# EAGLE board Gach_Krzysztf_SMiW_proj_pcb (EAGLE 9.7.0)
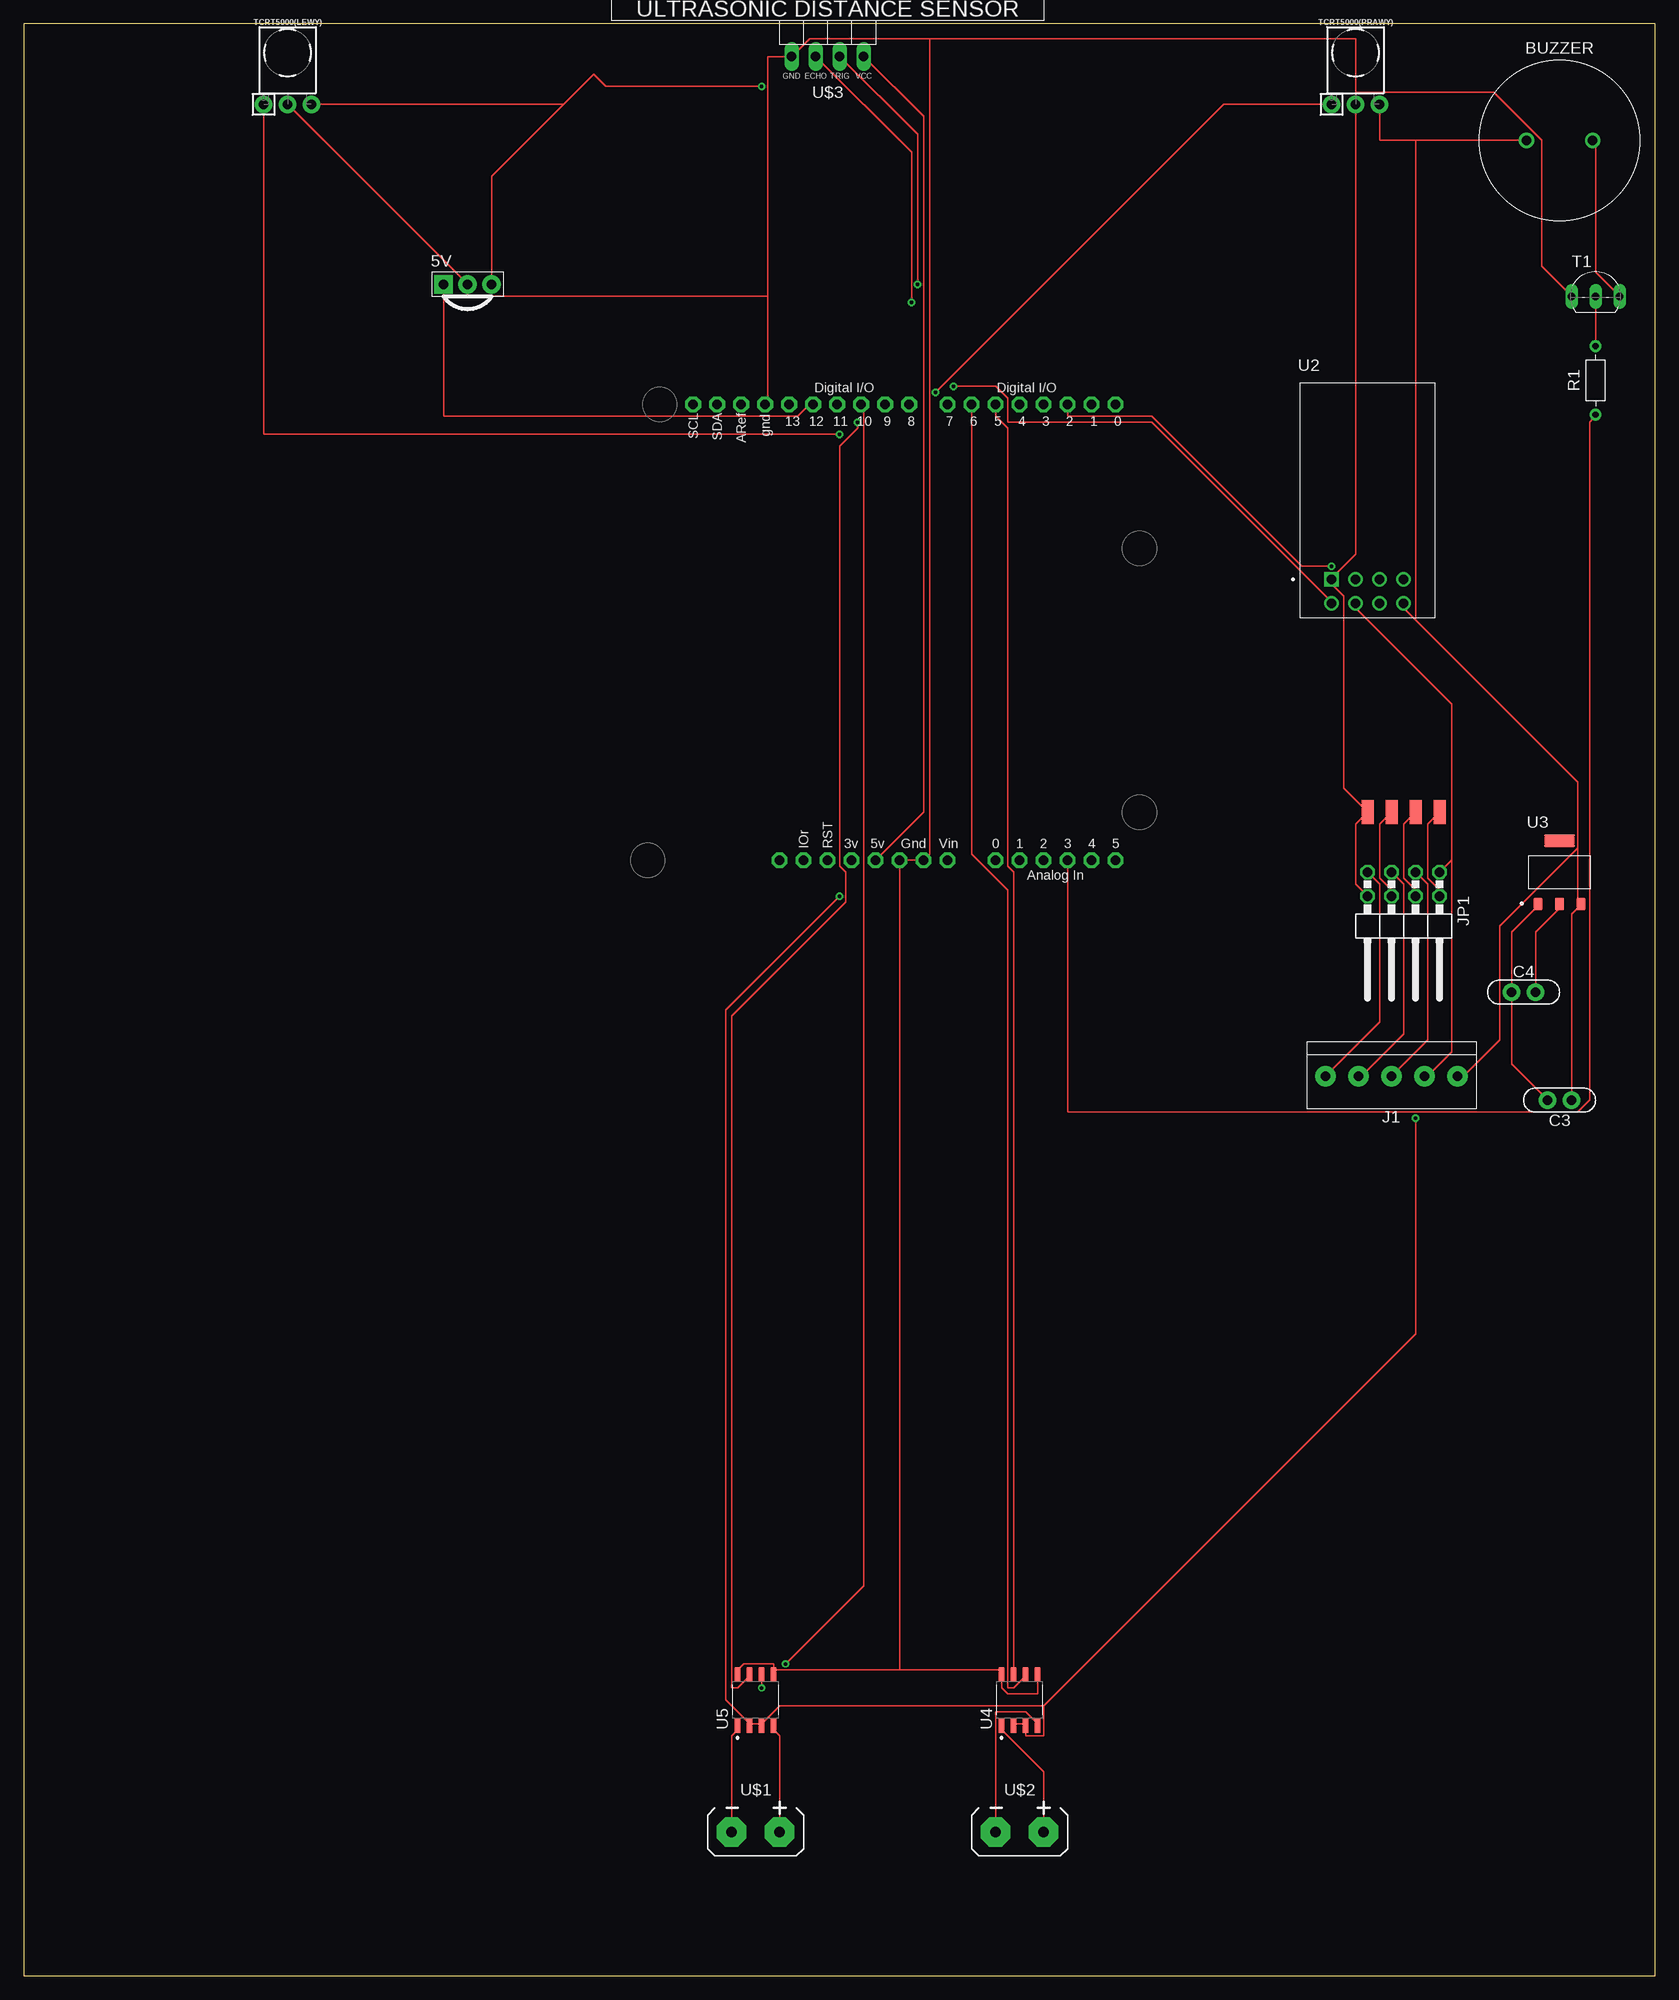
[diagram p0: board, top side]
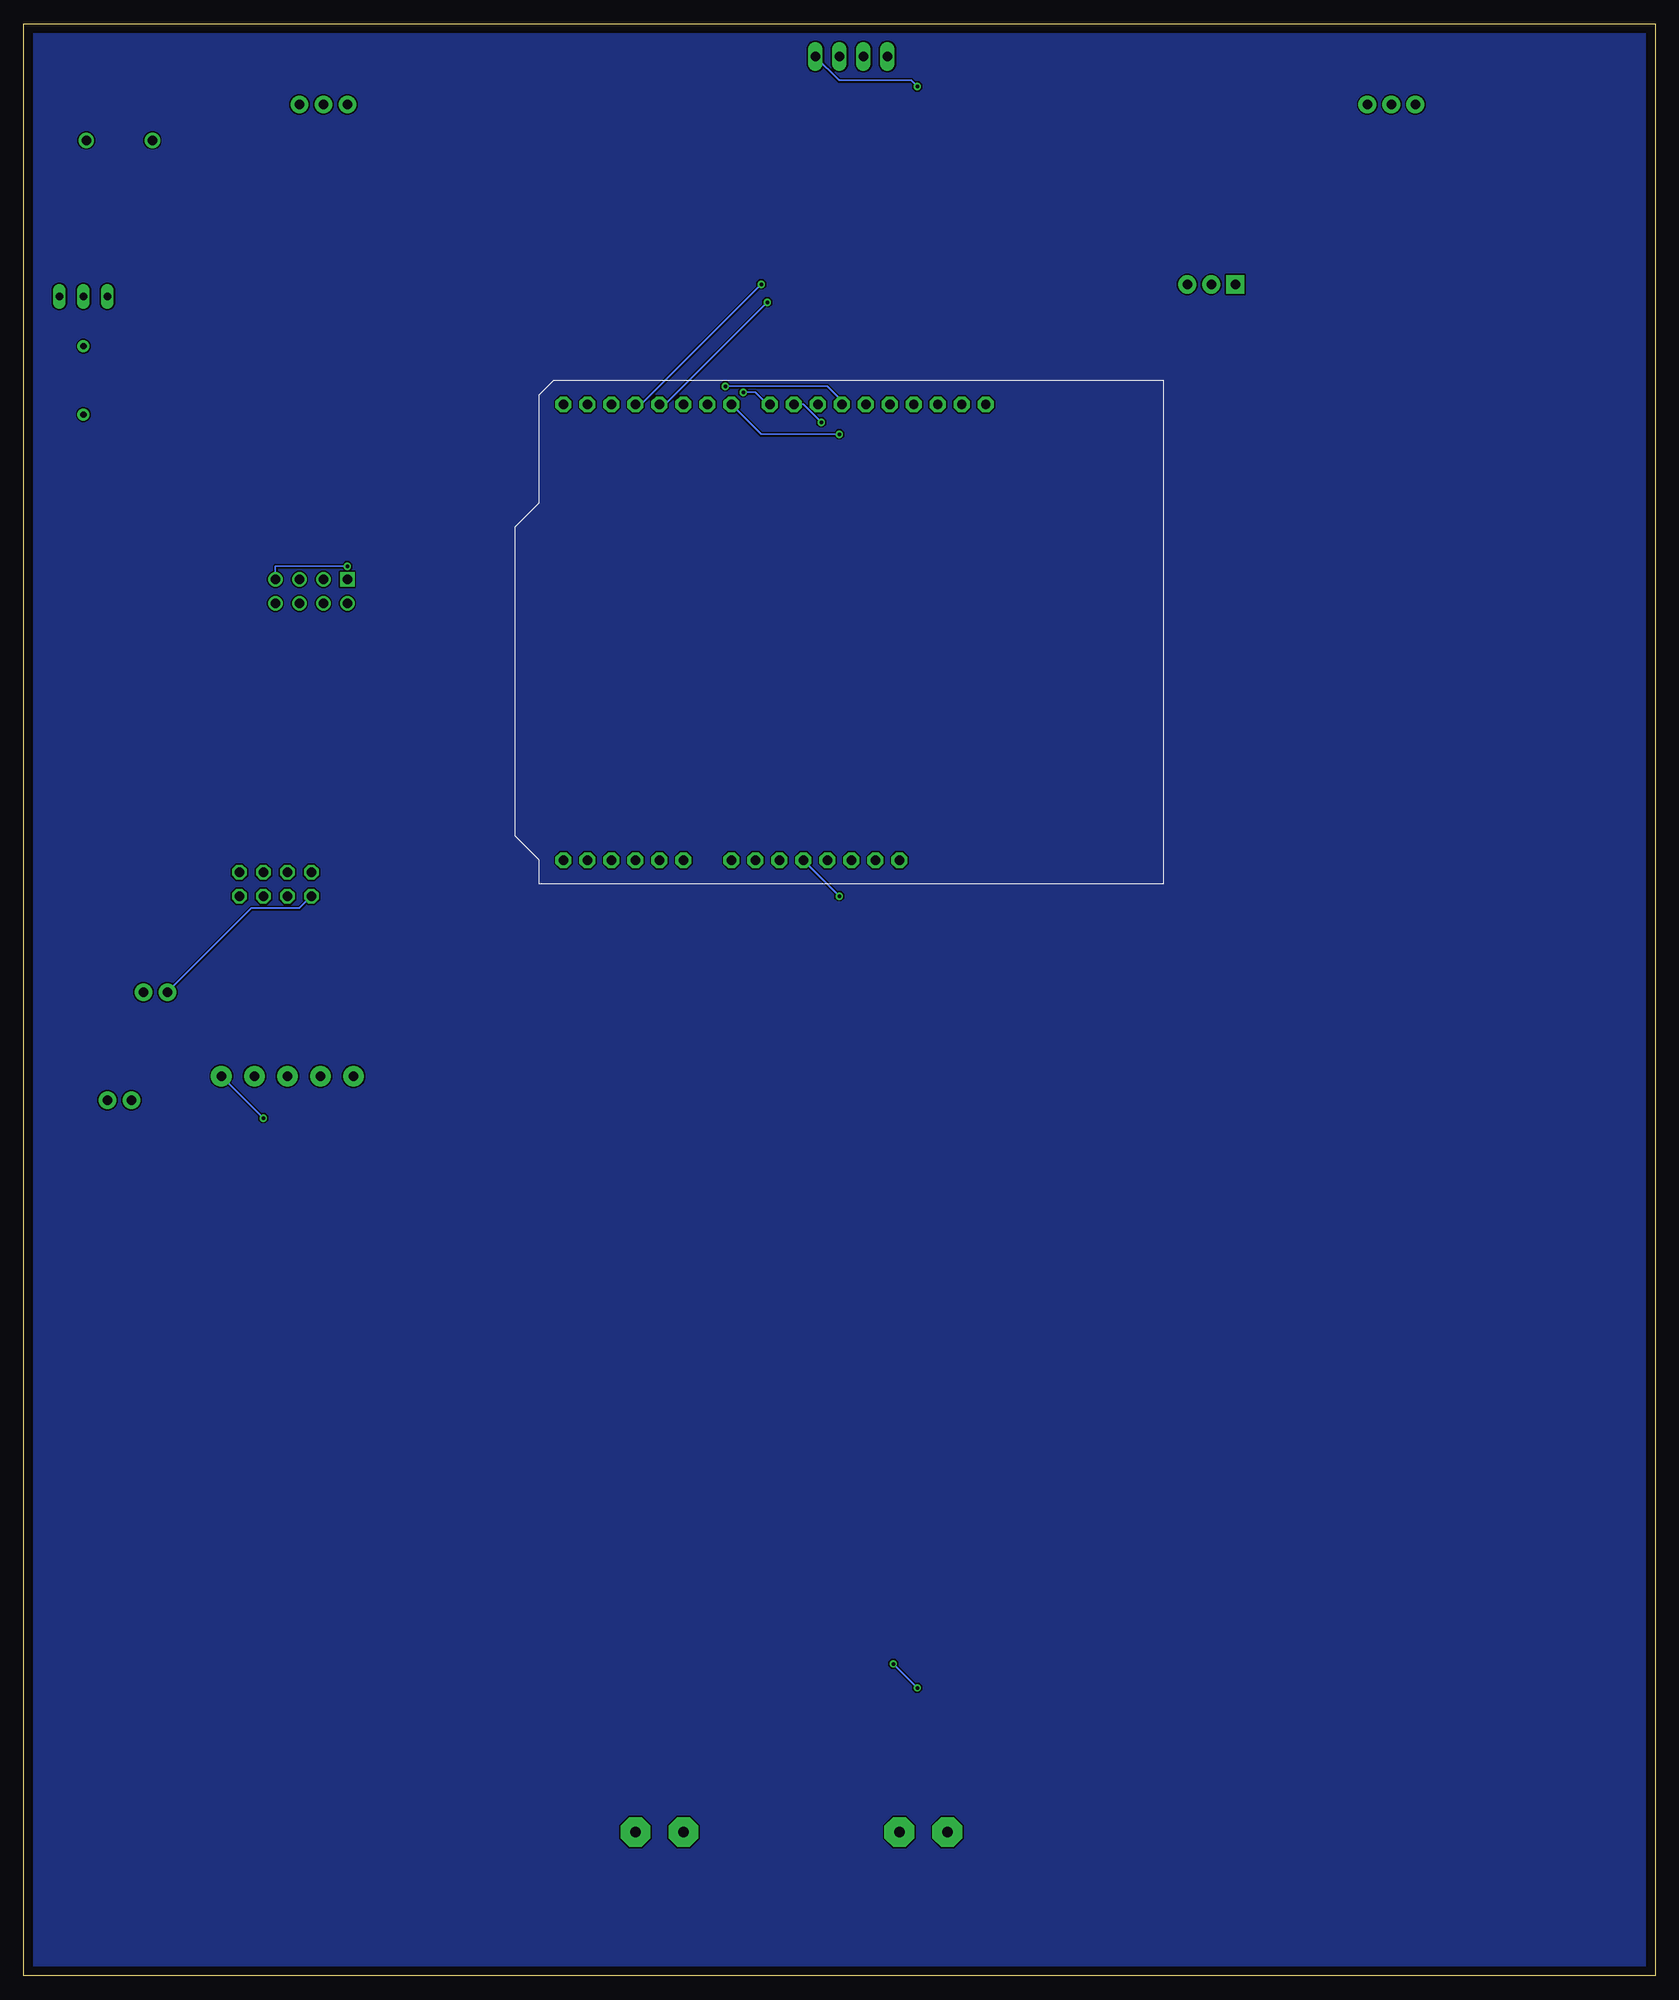
[diagram p1: board, bottom side, seen from below]

Size 172.7 x 206.68 mm. Coordinates in mm from the lower left corner, seen from the top.
Outline: 0,0 172.7,0 172.7,206.68 0,206.68 0,0
Copper layers (1*16): Top / Bottom
Stack-up Default Layer Stack: Top User Defined 0.035mm / Dielectric-1 User Defined 1.5mm / Bottom User Defined 0.035mm
Design rules: minimum copper width 6mil, minimum drill size 0.35mm, copper clearance wire_polygon to wire_polygon 6mil, copper clearance wire_polygon to pad_smd 6mil, copper clearance wire_polygon to via 6mil, copper clearance pad_smd to pad_smd 6mil, copper clearance pad_smd to via 6mil, copper clearance via to via 6mil, copper clearance smd to pad (same net) 6mil, copper clearance smd to via (same net) 6mil, copper clearance smd to smd (same net) 6mil, dimension clearance 40mil, via restrict clearance 0mil, restrict clearance 0mil, drill distance 6mil, keepout clearance 0mil

## Footprints (pad centres in the part's own frame; a part is rotated, then mirrored left to right if it is on the bottom)
PNA460XM = drill 1.016 pad 1.93 square: 1 -2.54,0 | drill 1.016 pad 1.93: 2 0,0; 3 2.54,0
PIEZO = drill 1 pad 1.6: 1 -3.5,0; 2 3.5,0
CAP-THRU-2.54MM = drill 1.016 pad 1.88: 1 -1.27,0; 2 1.27,0
1X4-SMT = smd 1.27 x 2.54: 1 -3.81,0; 2 -1.27,0; 3 1.27,0; 4 3.81,0
1X05-3.5MM = drill 1 pad 2.184: 1 7,0; 2 3.5,0; 3 0,0; 4 -3.5,0; 5 -7,0
2X04/90 = drill 1.016 octagon: 1 -3.81,-6.35; 2 -3.81,-3.81; 3 -1.27,-6.35; 4 -1.27,-3.81; 5 1.27,-6.35; 6 1.27,-3.81; 7 3.81,-6.35; 8 3.81,-3.81
RESAD724W46L381D178B = drill 0.66 pad 1.26: 1 -3.62,0; 2 3.62,0
TO92-EBC-OVAL = drill 0.813 long: B 0,-1.27; C 2.54,-1.27; E -2.54,-1.27
BRM-2508_VERT = drill 1.016 pad 1.88: 1 -2.54,0; 2 0,0; 3 2.54,0
ARDUINOR3-BPLACE = drill 1 pad 1.676 octagon: 3V 35.56,2.54; 5V 38.1,2.54; A0 50.8,2.54; A1 53.34,2.54; A2 55.88,2.54; A3 58.42,2.54; A4 60.96,2.54; A5 63.5,2.54; AREF 23.876,50.8; D0 63.5,50.8; D1 60.96,50.8; D2 58.42,50.8; D3 55.88,50.8; D4 53.34,50.8; D5 50.8,50.8; D6 48.26,50.8; D7 45.72,50.8; D8 41.656,50.8; D9 39.116,50.8; D10 36.576,50.8; D11 34.036,50.8; D12 31.496,50.8; D13 28.956,50.8; GND 26.416,50.8; GND1 43.18,2.54; GND2 40.64,2.54; IOREF 30.48,2.54; RESERVED 27.94,2.54; RESET 33.02,2.54; SCL 18.796,50.8; SDA 21.336,50.8; VIN 45.72,2.54
MODULE_ESP-01 = drill 1 square: 1 -3.81,-8.36 | drill 1: 2 -1.27,-8.36; 3 1.27,-8.36; 4 3.81,-8.36; 5 3.81,-10.9; 6 1.27,-10.9; 7 -1.27,-10.9; 8 -3.81,-10.9
SOT229P700X180-4N = smd 0.93 x 1.31: 1 -2.29,-3.345; 2 0,-3.345; 3 2.29,-3.345 | smd 3.24 x 1.31: 4 0,3.345
SOIC127P599X172-8N = smd 1.55 x 0.58: 1 -2.68,1.905; 2 -2.68,0.635; 3 -2.68,-0.635; 4 -2.68,-1.905; 5 2.68,-1.905; 6 2.68,-0.635; 7 2.68,0.635; 8 2.68,1.905
MOTOR = drill 1.118 pad 3.15 octagon: + 2.54,0; - -2.54,0
HC-SR04 = drill 1.016 long: 1 -3.81,0; 2 -1.27,0; 3 1.27,0; 4 3.81,0

## Placement (x,y rotation side)
5V  PNA460XM  [PNA460XM]  46.99,179.07 0 top
BUZZER  PIEZO  [PIEZO]  162.56,194.31 0 top
C3  100n  [CAP-THRU-2.54MM]  162.56,92.71 180 top
C4  100n  [CAP-THRU-2.54MM]  158.75,104.14 0 top
CN1  1X4SMT  [1X4-SMT]  146.05,123.19 0 top
J1  1X5  [1X05-3.5MM]  144.78,95.25 180 top
JP1  PINHD-2X4/90  [2X04/90]  146.05,110.49 180 top
R1  2k  [RESAD724W46L381D178B]  166.37,168.91 90 top
T1  2N2222  [TO92-EBC-OVAL]  166.37,179.07 0 top
TCRT5000(LEWY)  BRM-2A18VERT  [BRM-2508_VERT]  27.94,198.12 0 top
TCRT5000(PRAWY)  BRM-2A18VERT  [BRM-2508_VERT]  140.97,198.12 0 top
U1  ARDUINOR3-BPLACE  [ARDUINOR3-BPLACE]  52.07,115.57 0 top
U2  ESP-01  [MODULE_ESP-01]  142.24,156.21 0 top
U3  AMS1117-5.0  [SOT229P700X180-4N]  162.56,116.84 0 top
U4  L9110S  [SOIC127P599X172-8N]  105.41,29.21 90 top
U5  L9110S  [SOIC127P599X172-8N]  77.47,29.21 90 top
U$1  MOTOR_HDR  [MOTOR]  77.47,15.24 0 top
U$2  MOTOR_HDR  [MOTOR]  105.41,15.24 0 top
U$3  DISTANCE-SENSOR-4PINHC-SR04  [HC-SR04]  85.09,203.2 180 top

## Library data of the parts
5V CN1 J1 T1 U1 = adafruit
BUZZER C3 C4 U$1-U$3 = Tinkercad
JP1 = Connector; CATEGORY: Headers; DESCRIPTION: Header, Right Angle, 2x4 Position; MANUFACTURER: Generic; MPN: Generic; OPERATING_TEMPERATURE: Generic; PART_STATUS: Active; PITCH: 0.100" (2.54mm); ROHS_COMPLIANCE: Generic; SERIES: Generic; SUB-CATEGORY: Headers, Male Pins; TYPE: Board to Board or Cable, Unshrouded, Through Hole, Right Angle
R1 = Resistor; CATEGORY: Resistor; SUB-CATEGORY: Fixed
TCRT5000(LEWY) TCRT5000(PRAWY) = SparkFun-Sensors; PROD_ID: COMP-12505
U2 = ESP-01; AVAILABILITY: Not in stock; CHECK_PRICES: https://www.snapeda.com/parts/ESP-01/AI-Thinker/view-part/?ref=eda; DESCRIPTION: ESP-01M ESP8266 DIP Adapter series Transceiver; 802.11 b/g/n (Wi-Fi, WiFi, WLAN) Evaluation Board; MF: AI-Thinker; MP: ESP-01; PACKAGE: Non-Standard AI-Thinker; PRICE: None; SNAPEDA_LINK: https://www.snapeda.com/parts/ESP-01/AI-Thinker/view-part/?ref=snap
U3 = AMS1117-5.0; AVAILABILITY: In Stock; CHECK_PRICES: https://www.snapeda.com/parts/AMS1117-5.0/ams/view-part/?ref=eda; DESCRIPTION: 1A LOW DROPOUT VOLTAGE REGULATOR; MF: ams; MP: AMS1117-5.0; PACKAGE: SOT-223 Seeed Technology; PRICE: None; SNAPEDA_LINK: https://www.snapeda.com/parts/AMS1117-5.0/ams/view-part/?ref=snap
U4 U5 = L9110S; AVAILABILITY: Not in stock; CHECK_PRICES: https://www.snapeda.com/parts/L9110S/Onsemi/view-part/?ref=eda; DESCRIPTION: IC REG BUCK BOOST 20WLCSP; MF: LG Semicon; MP: L9110S; PACKAGE: None; PRICE: None; SNAPEDA_LINK: https://www.snapeda.com/parts/L9110S/Onsemi/view-part/?ref=snap

## Nets
3V: U1.3V
3V3: J1.4 JP1.1 U2.7
5V: 5V.3 BUZZER.1 C3.1 J1.5 TCRT5000(LEWY).3 TCRT5000(PRAWY).3 U1.5V U2.5 U3.3 U4.2 U4.3 U5.2 U5.3 U$3.1
A3: R1.1 U1.A3
D2: U1.D2 U2.4
D3: U1.D3 U$3.2
D4: U1.D4 U$3.3
D5: U1.D5 U4.7
D6: U1.D6 U4.6
D7: TCRT5000(LEWY).1 U1.D7
D8: TCRT5000(PRAWY).1 U1.D8
D9: U1.D9 U5.7
D10: U1.D10 U5.6
D11: U1.D11 U2.8
D12: 5V.1 U1.D12
EN: J1.2 JP1.5
GND: 5V.2 C3.2 C4.1 CN1.1 JP1.8 T1.E TCRT5000(LEWY).2 TCRT5000(PRAWY).2 U1.GND U1.GND1 U1.GND2 U2.1 U3.1 U4.5 U4.8 U5.5 U5.8 U$3.4
IO1: CN1.3 JP1.4
IO2: CN1.2 JP1.6
N$1: U5.4 U$1.+
N$2: U5.1 U$1.-
N$3: U4.1 U$2.+
N$4: U4.4 U$2.-
N$5: R1.2 T1.B
N$6: BUZZER.2 T1.C
N$7: C4.2 U3.2
RST: J1.3 JP1.3
RX: CN1.4 JP1.2
TX: J1.1 JP1.7
VIN: U1.VIN

## Tracks (layer width: path | path; a pad name or v marks a point on that pad's centre or on a via)
3V3
  Top 0.152: 151.13,118.11 151.13,134.62 140.97,144.78 U2.7 | JP1.1 151.13,118.11 | 151.13,118.11 151.13,97.79 148.59,95.25 J1.4
5V  (via drill 0.35)
  Top 0.152: 57.15,198.12 49.53,190.5 5V.3 | 57.15,198.12 60.33,201.3 61.59,200.03 v78.11,200.03 | 57.15,198.12 TCRT5000(LEWY).3 | U$3.1 95.25,196.85 95.25,123.19 U1.5V | 78.11,26.67 76.83,26.67 | U4.2 104.78,26.67 106.05,26.67 U4.3 106.05,25.4 107.95,25.4 107.95,28.58 | 78.11,26.67 80.01,28.58 107.95,28.58 | 78.11,26.67 U5.3 | 147.32,194.31 143.51,194.31 TCRT5000(PRAWY).3 | 147.32,194.31 BUZZER.1 | C3.1 163.83,112.4 164.47,113.03 U3.3 164.47,113.67 164.47,119.38 | 147.32,143.51 164.47,126.37 164.47,119.38 | 147.32,143.51 146.05,144.78 U2.5 | 164.47,119.38 156.21,111.12 156.21,99.06 152.4,95.25 J1.5 | 147.32,143.51 147.32,194.31 | 107.95,28.58 147.32,67.95 v147.32,90.81 | v86.36,114.3 74.3,102.24 74.3,29.21 76.83,26.67 | 76.83,26.67 U5.2
  Bottom 0.152: v78.11,200.03 78.74,200.66 86.36,200.66 U$3.1 | v147.32,90.81 151.76,95.25 J1.5 | v86.36,114.3 U1.5V
A3
  Top 0.152: U1.A3 110.49,91.44 164.47,91.44 165.74,92.71 165.74,164.47 166.37,165.1 R1.1
D2  (via drill 0.35)
  Top 0.152: v138.43,149.23 135.25,149.23 119.38,165.1 110.49,165.1 U1.D2
  Bottom 0.152: U2.4 146.05,149.23 v138.43,149.23
D3  (via drill 0.35)
  Top 0.152: U$3.2 94.61,194.94 v94.61,179.07
  Bottom 0.152: v94.61,179.07 107.31,166.37 U1.D3
D4  (via drill 0.35)
  Top 0.152: U$3.3 93.98,193.04 v93.98,177.17
  Bottom 0.152: v93.98,177.17 104.78,166.37 U1.D4
D5
  Top 0.152: U4.7 104.78,116.84 104.14,117.48 104.14,163.83 102.87,165.1 U1.D5
D6
  Top 0.152: U1.D6 100.33,118.75 104.14,114.94 104.14,30.48 104.78,30.48 106.05,31.75 U4.6
D7  (via drill 0.35)
  Top 0.152: v86.36,163.19 25.4,163.19 TCRT5000(LEWY).1
  Bottom 0.152: U1.D7 94.61,163.19 v86.36,163.19
D8  (via drill 0.35)
  Top 0.152: v96.52,167.64 127,198.12 TCRT5000(PRAWY).1
  Bottom 0.152: v96.52,167.64 95.25,167.64 93.98,166.37 U1.D8
D9  (via drill 0.35)
  Top 0.152: v88.27,164.47 88.27,163.83 86.36,161.93 86.36,117.48 87,116.84 87,113.67 74.93,101.6 74.93,30.48 75.56,30.48 76.83,31.75 U5.7
  Bottom 0.152: v88.27,164.47 90.17,166.37 U1.D9
D10  (via drill 0.35)
  Top 0.152: v78.11,30.48 U5.6 | v80.64,33.02 88.9,41.28 88.9,166.37 U1.D10
  Bottom 0.152: v80.64,33.02 v78.11,30.48
D11  (via drill 0.35)
  Top 0.152: v98.42,168.28 102.87,168.28 104.14,167 104.14,164.47 119.38,164.47 138.43,145.42 U2.8
  Bottom 0.152: v98.42,168.28 87.63,168.28 85.72,166.37 U1.D11
D12
  Top 0.152: 5V.1 44.45,165.1 81.92,165.1 83.19,166.37 U1.D12
EN
  Top 0.152: JP1.5 146.05,115.57 146.05,99.7 141.6,95.25 J1.2
GND
  Top 0.152: 79.38,32.39 79.38,33.02 76.2,33.02 75.56,32.39 U5.8 | U4.5 107.31,29.85 104.14,29.85 103.5,30.48 U4.8 103.5,32.39 92.71,32.39 | 92.71,32.39 79.38,32.39 | 79.38,32.39 U5.5 | 92.71,32.39 U1.GND2 U1.GND1 95.89,118.75 95.89,205.11 | 78.74,177.8 78.74,166.37 U1.GND | 78.74,177.8 78.74,203.2 U$3.4 83.19,205.11 95.89,205.11 | TCRT5000(LEWY).2 5V.2 46.99,177.8 78.74,177.8 | T1.E 160.66,180.98 160.66,194.31 155.57,199.39 140.97,199.39 | 140.97,199.39 TCRT5000(PRAWY).2 140.97,150.5 138.43,147.96 U2.1 138.43,147.32 139.7,146.05 139.7,125.73 CN1.1 140.97,121.92 140.97,115.57 JP1.8 | U3.1 160.02,113.03 157.48,110.49 C4.1 157.48,96.52 C3.2 | 95.89,205.11 140.97,205.11 140.97,199.39
  Bottom 0.152: C4.1 148.59,113.03 143.51,113.03 JP1.8
IO1
  Top 0.152: CN1.3 146.05,121.92 146.05,116.21 147.32,114.94 JP1.4
IO2
  Top 0.152: CN1.2 143.51,121.92 143.51,116.21 144.78,114.94 JP1.6
N$1
  Top 0.152: U$1.+ 80.01,25.4 79.38,26.04 U5.4
N$2
  Top 0.152: U$1.- 74.93,25.4 75.56,26.04 U5.1
N$3
  Top 0.152: U$2.+ 107.95,21.59 103.5,26.04 U4.1
N$4
  Top 0.152: U$2.- 102.87,27.94 106.05,27.94 107.31,26.67 U4.4
N$5
  Top 0.152: T1.B R1.2
N$6
  Top 0.152: T1.C 166.37,180.34 166.37,194.31 BUZZER.2
N$7
  Top 0.152: C4.2 160.02,110.49 162.56,113.03 U3.2
N$8
  pour Bottom: 0,207.01 172.72,207.01 172.72,0 0,0
RST
  Top 0.152: JP1.3 148.59,115.57 148.59,99.06 J1.3
RX
  Top 0.152: CN1.4 148.59,121.92 148.59,116.21 149.86,114.94 JP1.2
TX
  Top 0.152: JP1.7 143.51,115.57 143.51,100.97 137.79,95.25 J1.1